# Altium PCB 板.PcbDoc (part 2 of 3)
Units mil, origin at the board's own origin, x right, y up, seen from the top; angles counter-clockwise.
Board outline 8500 x 4400 mil, 4 copper layers (Top Layer, 02gnd, 03vcc, Bottom Layer); 131 components, 485 nets, 1153 pads, 930 vias.
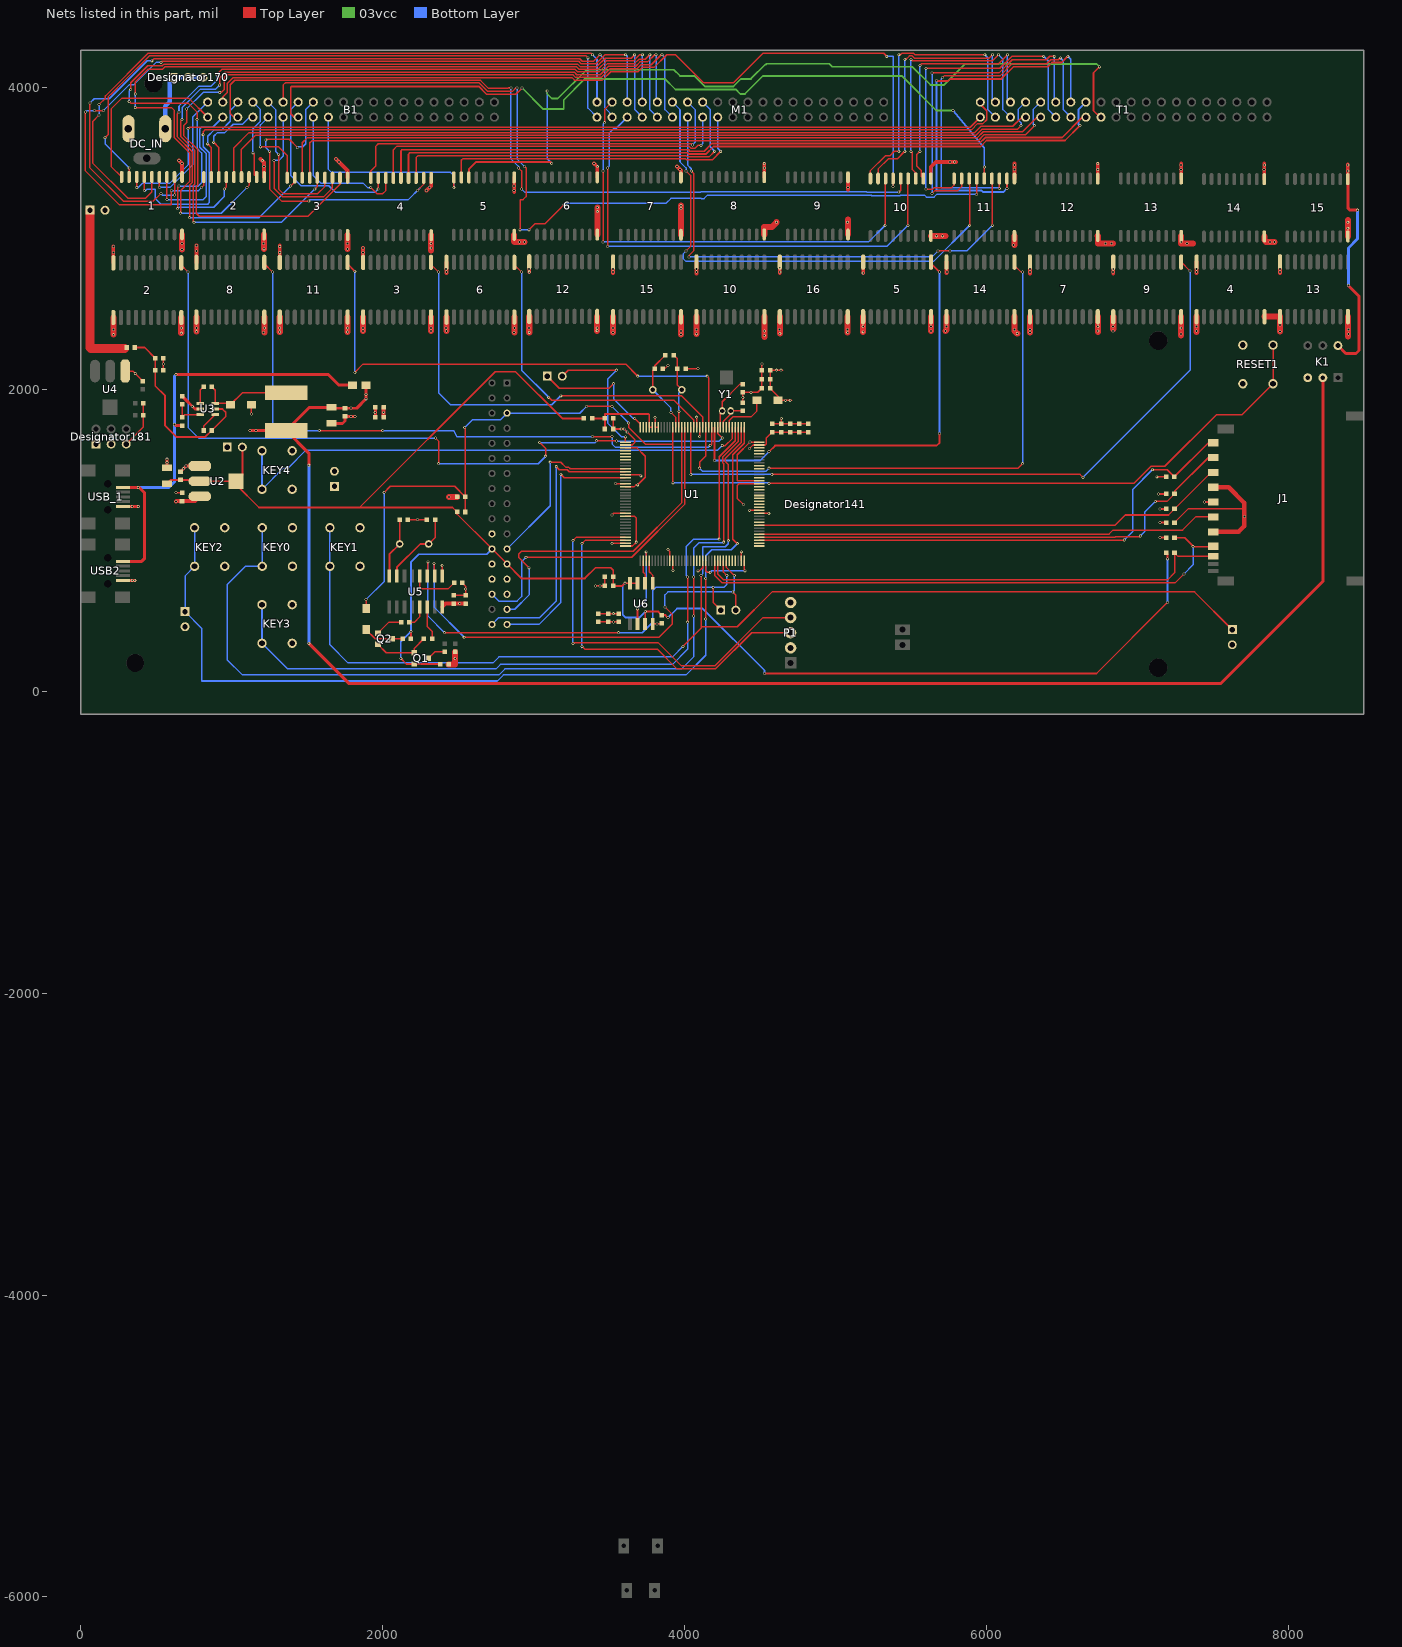
[diagram p4: the nets of this part, all layers, seen from the top]

## Via types
v1: diameter 19.68, hole 11.81, Top Layer to Bottom Layer, 922 vias
v2: diameter 118.11, hole 118.11, Top Layer to Bottom Layer, tented both sides, 4 vias
v3: diameter 50, hole 40, Top Layer to Bottom Layer, 2 vias
v4: diameter 39.37, hole 39.37, Top Layer to Bottom Layer, 2 vias

## Nets (pads, with @x,y where several pads share a name; then routed paths per layer and width w, separated by ;. In a path a pad name is that pad's centre, name@x,y a point inside that pad or via, vN(x,y) a via of type N, cw(c..) or ccw(c..) an arc to the next point about the centre after c; other vN are vias at no path point) (continued)
GND: 1.9 2.1@215,2478.9 2.9@1214,3029 2.10@665,2478.9 3.1@1869.98,2481.89 3.9@1767,3025 3.10@2319.98,2481.89 4.1@7393.56,2483.89 4.9@2321,3024 4.10@7843.56,2483.89 5.1@5183.85,2483.89 5.9@2871,3027 5.10@5633.85,2483.89 6.1@2422.41,2481.89 6.9@3422,3028 6.10@2872.41,2481.89 7.1@6288.71,2483.89 7.9@3976.3,3027 7.10@6738.71,2483.89 8.1@765.12,2481.89 8.9@4528.3,3029 8.10@1215.12,2481.89 9.1@6841.13,2483.89 9.9@5083.3,3028 9.10@7291.13,2483.89 10.1@4078.99,2483.89 10.9@5632.3,3020 10.10@4528.99,2483.89 11.1@1317.55,2481.89 11.9@6186.3,3020 11.10@1767.55,2481.89 12.1@2971,2485.9 12.9@6738.3,3019 12.10@3421,2485.9 13.1@7946.3,2484.9 13.9@7291.3,3020 13.10@8396.3,2484.9 14.1@5736.28,2483.89 14.9@7842.3,3016 14.10@6186.28,2483.89 15.1@3526.56,2483.89 15.9@8395.3,3016 15.10@3976.56,2483.89 16.1 16.10 C2.1 C3.1 C4.1 C6.1 C7.1 C8.1 C9.1 C10.1 C11.2 C12.2 C13.2 C14.2 C15.2 C16.2 C17.2 C18.2 C19.2 C20.2 C21.2 C26.1 C27.1 C29.1 C30.1 C31.1 C32.2 C37.1 C38.1 C39.1 C41.2 C42.1 C43.2 C44.1 C45.1 C47.2 C48.2 C49.2 D3.1 DC_IN.2 Designator137.1 Designator138.1 Designator139.2 Designator141.22 Designator141.26 Designator141.27 Designator141.29 Designator161.2 Designator162.2 Designator165.2 Designator166.2 Designator181.1 Designator181.3 Designator181.5 J1.3 J1.6 KEY0.1 KEY1.1 KEY2.1 KEY3.1 KEY4.1 P1.2 R7.2 R14.2 RESET1.2 U1.16 U1.30 U1.31 U1.38 U1.48 U1.51 U1.61 U1.71 U1.83 U1.94 U1.107 U1.120 U1.130 U1.143 U2.1 U3.2 U4.1 U5.1 U6.4 USB2.5 USB_1.5 | length 10532.8
  Top Layer w10: U4.1@293.97,2123.95 343.62,2123.95 C48.2@410.06,2057.5 ; Designator181.5@300,1640 414.2,1754.2 C47.2@414.2,1829.94 C49.2@414.2,1909.94 ; C30.1@547,2130 C31.1@547,2210 ; v1(630,1320) 633,1317 C26.1@670,1317 ; v1(1130,1840) D3.1@1130,1900 ; C39.1@2167,1140 C38.1@2293,1140 ; U5.1@2394.3,765.36 v1(2394.3,834.3) ; C43.2@2470.06,637.5 C32.2@2550.06,637.5 2550.06,696.94 C37.1@2527,720 ; C16.2@3428.24,461.5 C15.2@3493.24,461.5 C17.2@3563.24,461.5 ; v1(3520,1170) 3531.17,1181.17 U1.61@3608.37,1181.17 ; v1@3524.32,984.32 U1.71@3608.37,984.32 ; C10.1@3527,1810 C9.1@3527,1740 v1(3600,1740) 3670,1670 3670,1650 3653.92,1633.92 U1.38@3608.37,1633.92 ; v1(3541.98,1378.02) U1.51@3608.37,1378.02 ; U1.48@3608.37,1437.07 3702.93,1437.07 v1(3710,1430) ; U6.4@3788.36,448 3845.44,448 C41.2@3849.94,452.5 ; v1(3805.22,1815.22) U1.31@3805.22,1752.03 U1.30@3824.91,1752.03 ; C7.1@3870,2140 v1(3890,2160) ; v1(3890,940) 3903.65,926.35 U1.83@3903.65,866.21 ; C8.1@4007,2140 v1(4090,2140) ; v1(4090,800) 4100,800 4120.18,820.18 U1.94@4120.18,866.21 ; v1(4100.5,1690.5) U1.16@4100.5,1752.03 ; U1.107@4376.09,866.21 v1(4376.09,926.09) ; C3.1@4386.17,1914.13 C4.1@4386.17,1983 4485.44,1983 C13.2@4512.5,2010.06 C19.2@4512.5,2070.06 C14.2@4512.5,2130.06 v1(4512.5,2170) ; v1(4390,1240) 4350,1280 4350,1366.03 4361.98,1378.02 U1.130@4494.2,1378.02 ; v1(4430,1610) 4453.92,1633.92 U1.143@4494.2,1633.92 4533.92,1633.92 4540,1640 4540,1679 C20.2@4581,1720 C21.2@4700,1720 C18.2@4820,1720 ; U1.120@4494.2,1181.17 v1(4558.83,1181.17) ; C42.1@7247,1120 7337,1210 7710,1210
  Top Layer w20: USB2.5@279.06,737.01 v1(357.01,737.01) ; USB_1.5@279.06,1227.01 v1(380,1227.01) ; Designator162.2@570,1483.15 v1(570,1540) ; C45.1@660,1457 v1(697,1494) U2.1@788.24,1494 ; R14.2@670.06,1957.5 670.78,1957.5 755.68,1872.6 U3.2@790,1872.6 ; Designator161.2@1660,1776.85 1733.15,1776.85 1750,1793.7 C29.1@1750,1823 v1(1817,1823) ; C27.1@1951.3,1818 C2.1@1951.3,1883
  Top Layer w30: J1.6@7503.66,1058.54 7671.46,1058.54 7710,1097.08 7710,1210 7710,1250 7606.18,1353.82 J1.3@7503.66,1353.82
  Top Layer w40: v1(215,2365) 2.1@215,2478.9 ; v1(665,2375) 2.10@665,2478.9 ; v1(670,2930) 1.9@670,3030 ; v1(765.12,2385.12) 8.1@765.12,2481.89 ; v1(1214,2934) 2.9@1214,3029 ; v1@1215.12,2380 8.10@1215.12,2481.89 ; v1(1317.55,2382.45) 11.1@1317.55,2481.89 ; v1(1767,2933) 3.9@1767,3025 ; v1(1767.55,2382.45) 11.10@1767.55,2481.89 ; v1(1869.98,2390.02) 3.1@1869.98,2481.89 ; v1(2320,2390) 3.10@2319.98,2481.89 ; 2321,2924.15 4.9@2321,3024 ; v1(2422.41,2390) 6.1@2422.41,2481.89 ; C44.1@2437,180 2480,180 2479.94,180.06 R7.2@2479.94,262.5 ; v1(2440,1290) C6.1@2493,1290 ; 5.9@2871,3027 2871,2981 2872,2980 v1(2940,2980) ; v1@2872.41,2380 6.10@2872.41,2481.89 ; v1(2971,2381) 12.1@2971,2485.9 ; v1(3421,2391) 12.10@3421,2485.9 ; 6.9@3422,3028 v1(3422,3208) ; v1(3526.56,2380) 15.1@3526.56,2483.89 ; 7.9@3976.3,3027 v1(3976.3,3220) ; v1(3976.56,2366.56) 15.10@3976.56,2483.89 ; v1(4078.99,2371.01) 10.1@4078.99,2483.89 ; 8.9@4528.3,3029 4528.3,3078.3 4530,3080 4580,3080 v1(4610,3110) ; v1@4528.99,2351.01 10.10@4528.99,2483.89 ; v1(4631.42,2371.42) 16.1@4631.42,2483.89 ; v1(5081.42,2380) 16.10@5081.42,2483.89 ; 9.9@5083.3,3028 5083.3,3126.7 ; v1(5183.85,2383.85) 5.1@5183.85,2483.89 ; 10.9@5632.3,3020 5730,3020 ; v1(5633.85,2390) 5.10@5633.85,2483.89 ; v1(5730,2390) 5736.28,2396.28 14.1@5736.28,2483.89 ; 14.10@6186.28,2483.89 6186.28,2391.14 v1(6204.87,2372.55) ; v1@6186.3,2960 11.9@6186.3,3020 ; v1(6288.71,2378.71) 7.1@6288.71,2483.89 ; 12.9@6738.3,3019 6740,3017.3 6740,2970 6840,2970 ; v1@6738.71,2384.17 7.10@6738.71,2483.89 ; 6841.13,2401.13 9.1@6841.13,2483.89 ; 7291.13,2358.87 9.10@7291.13,2483.89 ; 13.9@7291.3,3020 7291.3,2970 7370,2970 ; v1@7393.56,2383.56 4.1@7393.56,2483.89 ; 14.9@7842.3,3016 7842.3,2992.3 7854.6,2980 v1(7880,2980) v1(7910,2980) ; 4.10@7843.56,2484.9 13.1@7946.3,2484.9 v1(7946.3,2386.57) ; 15.9@8395.3,3016 8395.3,3124.7 ; 8396.3,2353.7 13.10@8396.3,2484.9
  other v1: 2479.94,220 3816.9,448 3530,461.5 2550,680 340,737.01 3520,980 2230,1140 7710,1160 340,1227.01 680,1477 570,1516.57 3620,1720 3580,1740 1790,1823 1950,1850 738.28,1890 4386.17,1948.56 4440,1983 360,2107.56 547,2170 4528.99,2360 7290,2370 8400,2370 1210,2380 2870,2380 3976.56,2390 4528.99,2390 6738.71,2390 6840,2390 7393.56,2390 215,2400 4078.99,2400 4630,2400 5080,2400 6186.28,2400 6288.71,2400 8400,2400 665,2410 765.12,2410 1215.12,2410 1317.55,2410 1767.55,2410 1869.98,2410 2320,2410 2420,2410 2872.41,2410 2970,2410 3421,2410 3526.56,2410 7291.13,2410 5183.85,2420 5633.85,2420 5736.28,2420 6738.71,2420 6840,2420 7393.56,2420 7946.3,2430 2321,2940 6180,2960 670,2970 1210,2970 1767,2970 2321,2970 6790,2970 6830,2970 7330.65,2970 2906,2980 7291.3,2980 5670,3020 5710,3020 8395.3,3070.35 5080,3110 8395.3,3110 3422,3180 3976.3,3200
IOVDD: 
"IWIRE DQ": 
"JOY CLK": J1.5 U1.113 | length 3056.5
  Top Layer w10: U1.113@4494.2,1043.37 6813.37,1043.37 6840,1070 7300,1070 7386.97,1156.97 J1.5@7503.66,1156.97
"JOY DAT": J1.8 R28.1 U1.99 | length 3549.1
  Top Layer w10: U1.99@4218.61,866.21 4218.61,781.39 4260,740 7200,740 7247,787 R28.1@7247,920 7271,896 J1.8@7503.3,896
"JOY LAT": J1.7 R27.1 U1.98 | length 3740.2
  Top Layer w10: U1.98@4198.92,866.21 4198.92,771.08 4250,720 7250,720 v1(7310,780) ; R27.1@7247,1020 7314.7,1020 v1@7371.63,963.07 ; v1(7370,960) 7500.59,960 J1.7@7503.66,963.07
  Bottom Layer w10: v1(7310,780) 7370,840 v1(7370,960)
JRDO: 
JTCK: U1.109
JTDI: U1.110
JTMS: U1.105
KEY0: KEY0.2 U1.3 | length 5963.4
  Top Layer w10: v1(4060,500) v1(4060,760) ; v1(4260,990) 4260,1510 4252.13,1517.87 4252.13,1552.68 4356.4,1656.96 U1.3@4356.4,1752.03
  Bottom Layer w10: KEY0.2@1201.65,1085.9 KEY0.2@1201.65,830 1090,830 970,710 970,210 1070,110 2770,110 2810,150 3980,150 4060,230 v1(4060,500) ; v1(4060,760) 4060,950 4097.28,987.28 4257.28,987.28 v1(4260,990)
KEY1: Designator165.1 KEY1.2 U1.2 | length 8646.4
  Top Layer w10: v1(3990,300) 4110,420 4110,430 ; v1(4110,770) 4110,430 ; v1(4290,1000) 4290,1505.28 4270,1525.28 4270,1545.28 4376.09,1651.37 U1.2@4376.09,1752.03 ; Designator165.1@7630,410 7380,660 4580,660 4350,430 4110,430
  Bottom Layer w10: KEY1.2@1650,1085.9 KEY1.2@1650,830 1650,310 1770,190 2730,190 2770,230 3920,230 v1(3990,300) ; v1(4110,770) 4120,780 4120,960 4270,960 4290,980 v1(4290,1000)
KEY2: Designator166.1 KEY2.2 U1.1 | length 6217.1
  Top Layer w10: v1(4140,480) v1(4140,750) ; v1(4350,980) 4320,1010 4320,1570 4395.77,1645.77 U1.1@4395.77,1752.03
  Bottom Layer w10: KEY2.2@753.3,1085.9 KEY2.2@753.3,830 690,766.7 Designator166.1@690,530 800,420 800,70 2760,70 2800,110 4010,110 4140,240 v1(4140,480) ; v1(4140,750) 4140,900 4180,940 4310,940 v1(4350,980)
KEY3: KEY3.2 U1.4 | length 4911.3
  Top Layer w10: v1(4020,460) v1(4020,760) ; v1(4230,1010) 4230,1555.83 4336.72,1662.55 U1.4@4336.72,1752.03
  Bottom Layer w10: KEY3.2@1200,575.9 KEY3.2@1200,320 1370,150 2750,150 2780,180 3920,180 4020,280 v1(4020,460) ; v1(4020,760) 4010,770 4010,960 4060,1010 v1(4230,1010)
KEY4: KEY4.2 U1.5 | length 3587.5
  Top Layer w10: v1(4250,1630) 4270,1630 4317.03,1677.03 U1.5@4317.03,1752.03
  Bottom Layer w10: KEY4.2@1200,1595.9 KEY4.2@1200,1340 1340,1480 1371.84,1480 1491.84,1600 4220,1600 v1(4250,1630)
"LCD BL": Designator141.23 U1.46 | length 1209.8
  Top Layer w10: v1(3110,1520) 3180,1520 3212.13,1487.87 3230.91,1487.87 3242.35,1476.44 U1.46@3608.37,1476.44
  Bottom Layer w10: Designator141.23@2824.06,945.08 3110,1231.02 v1(3110,1520)
LED0: U1.135
LED1: 
LRCK: 
MCLK: 
"MP3 LEFT": 
"MP3 RIGHT": 
NetANT1_1: 
NetBAT_1: 
NetBEEP1_2: 
NetBOOT1_3: 
NetBOOT1_4: 
NetC3_2: C3.2 U1.8 Y1.2 | length 208.3
  Top Layer w10: U1.8@4257.98,1752.03 4257.98,1790.99 4306.02,1839.02 Y1.2@4306.02,1860 4385.74,1860 C3.2@4386.24,1859.5
NetC4_2: C4.2 U1.9 Y1.1 | length 357.7
  Top Layer w10: U1.9@4238.29,1752.03 4238.29,1848.3 Y1.1@4249.99,1860 4249.99,1919.99 4367.5,2037.5 C4.2@4386.24,2037.5
NetC7_2: C7.2 R2.1 U1.24 Y2.1 | length 575.7
  Top Layer w10: Y2.1@3790,2000 3790,2127.56 C7.2@3802.5,2140.06 3802.5,2159.5 R2.1@3873,2230 ; v1(3910,1850) 3943.02,1816.98 U1.24@3943.02,1752.03
  Bottom Layer w10: Y2.1@3790,2000 3910,1880 v1(3910,1850)
NetC8_2: C8.2 R2.2 U1.23 Y2.2 | length 508.6
  Top Layer w10: R2.2@3927.5,2229.94 3952.5,2204.94 3952.5,2029.63 Y2.2@3982.13,2000 ; U1.23@3962.7,1752.03 v1(3962.7,1857.3)
  Bottom Layer w10: v1(3962.7,1857.3) 3962.7,1980.58 Y2.2@3982.13,2000
NetC22_1: C22.1 U3.1 | length 119.5
  Top Layer w10: U3.1@790,1910 790,1997 C22.1@813,2020
NetC22_2: C22.2 D3.2 L1.2 U3.6 | length 626.5
  Top Layer w10: C22.2@867.5,2019.94 890,1997.44 U3.6@890,1910 980,1910 D3.2@990,1900 1070,1980 L1.2@1360,1980
NetC30_2: C30.2 C31.2 R4.1 R15.1 U3.5 | length 1235
  Top Layer w12: R4.1@357,2280 422.56,2280 C31.2@492.5,2210.06 C30.2@492.5,2130.06 492.5,2025 557.5,1960 557.5,1762.5 632.5,1687.5 824.5,1687.5 R15.1@867,1730 960,1823 960,1850 937.4,1872.6 U3.5@890,1872.6
NetC37_2: C37.2 U5.4 | length 321
  Top Layer w10: U5.4@2244.3,765.36 2244.3,695.7 2260,680 2432.44,680 C37.2@2472.5,720.06
NetC38_2: C38.2 U5.7 Y3.1 | length 512.4
  Top Layer w11.81: U5.7@2094.3,765.36 2094.3,824.3 2248,978 Y3.1@2304.3,978 2347.5,1021.2 C38.2@2347.5,1139.94
NetC39_2: C39.2 U5.8 Y3.2 | length 403
  Top Layer w11.81: U5.8@2044.3,765.36 2044.3,910.13 Y3.2@2112.17,978 2112.17,1139.74 C39.2@2112.5,1140.06
NetC46_1: 
NetC49_1: 
NetC49_2: 
NetC50_1: 
NetC50_2: 
NetC55_2: 
NetC57_1: 
NetC58_1: 
NetC66_2: 
NetC67_2: 
NetC68_2: 
NetC69_2: 
NetC70_1: 
NetC70_2: 
NetC74_2: 
NetC75_2: 
NetC76_2: 
NetC77_1: 
NetC77_2: 
NetC78_1: 
NetC78_2: 
NetC79_1: 
NetC80_1: 
NetC81_1: 
NetC82_1: 
NetC91_2: 
NetCAN1_1: 
NetCAN1_3: 
NetD1_2: D1.2 U1.6 | length 323.9
  Top Layer w10: U1.6@4297.35,1752.03 4297.35,1797.35 4320,1820 4440,1820 4480,1860 D1.2@4480,1930
NetD4_1: 1.10 2.10@1214,3409 3.10@1767,3405 4.10@2321,3404 5.10@2871,3407 6.10@3422,3408 7.10@3976.3,3407 8.10@4528.3,3409 9.10@5083.3,3408 10.10@5632.3,3400 11.10@6186.3,3400 12.10@6738.3,3399 13.10@7291.3,3400 14.10@7842.3,3396 15.10@8395.3,3396 DC_IN.1 Designator139.1 Designator170.1 Designator170.2 Designator170.3 K1.6 R4.2 | length 4833.9
  Top Layer w20: K1.6@8330,2292.6 8382.6,2240 8450,2240 8470,2260 8470,2620 v1(8400,2690) ; 15.10@8395.3,3396 8395.3,3205.3 8410.6,3190 v1(8460,3190)
  Top Layer w25: v1(650,3520) v1(670,3500) 1.10@670,3410 ; 1190,3530 1214,3506 2.10@1214,3409 ; v1(1690,3530) 1767,3453 3.10@1767,3405 ; v1(2290,3320) 2321,3351 4.10@2321,3404 ; 2871,3310 5.10@2871,3407 ; v1(3400,3500) v1(3422,3478) 6.10@3422,3408 ; v1(3950,3480) 3976.3,3453.7 7.10@3976.3,3407 ; 8.10@4528.3,3409 v1(4528.3,3498.3) ; 5083.3,3326.7 9.10@5083.3,3408 ; 10.10@5632.3,3400 5632.3,3477.7 5664.6,3510 5800,3510 ; 11.10@6186.3,3400 6186.3,3500 ; 12.10@6738.3,3399 v1(6738.3,3498.3) ; 13.10@7291.3,3400 v1@7291.3,3498.7 ; 14.10@7842.3,3396 7842.3,3500 ; 15.10@8395.3,3396 v1(8395.3,3450) v1(8395.3,3490) v1@8395.3,3494.7
  Top Layer w59.06: Designator139.1@60,3190 60,2280 66.01,2273.99 R4.2@289.99,2273.99
  Bottom Layer w20: v1(8400,2690) 8400,2940 8460,3000 v1(8460,3190)
  Bottom Layer w30: DC_IN.1@560,3730 560,3880 590,3910 590,4050 Designator170.1@610,4070 Designator170.2@710,4070 Designator170.3@810,4070
  other v1: 2870,3320 2310,3340 5083.3,3340 2870,3350 3970,3460 6186.3,3460 6738.3,3460 7290,3460 7840,3460 4528.3,3470 1214,3480 6186.3,3490 7290,3490 7842.3,3490 1710,3510 5760,3510 5790,3510 1202,3518
NetD7_2: D7.2 Q2.3 R20.2 | length 267.3
  Top Layer w10: D7.2@1890,410 1950,350 Q2.3@2061.26,350 R20.2@2132.44,350
NetDS1_1: 
NetDS2_1: 
NetEJ_2: 
NetEJ_4: 
NetF1_2: 
NetLED2: 
NetP5_5: 
NetP5_6: 
NetQ1_2: Q1.2 Q2.1 R18.2 | length 381.9
  Top Layer w10: Q2.1@1968.74,312.6 2023.94,257.4 Q1.2@2208.74,257.4 2208.74,286.3 R18.2@2272.5,350.06
NetQ1_3: Q1.3 R17.1 | length 126.6
  Top Layer w10: Q1.3@2301.26,220 2344.26,263 R17.1@2410,263
NetQ2_2: Q2.2 R19.2 | length 183.9
  Top Layer w10: Q2.2@1968.74,387.4 2041.4,460.06 R19.2@2122.5,460.06
NetQ3_2: 
NetR1_2_1: 
NetR4_1: 
NetR4_1_1: 
NetR14_1: R14.1 R16.2 U3.3 | length 212.8
  Top Layer w10: R14.1@670,1903 670,1817.56 R16.2@670.06,1817.5 687.76,1835.2 U3.3@790,1835.2
NetR15_2: R15.2 U3.4 | length 137.2
  Top Layer w10: R15.2@812.5,1730.06 812.5,1757.7 U3.4@890,1835.2
NetR18_1: R18.1 U5.14 | length 224.2
  Top Layer w10: U5.14@2294.3,560.64 2294.3,432.7 2327,400 R18.1@2327,350
NetR19_1: R19.1 U5.13 | length 147.8
  Top Layer w10: R19.1@2177,460 2210,460 2244.3,494.3 U5.13@2244.3,560.64
NetR26_1: 
NetR30_1: 
NetR31_1: 
NetR37_1: 
NetR42_1: 
NetR47_2: 
NetR55_1: 
NetR58_1: 
NetU11_11: 
"NRF CE": U1.91
"NRF CS": U1.92
"NRF IRQ": U1.93
OUTL: 
OUTR: 
"OV SCL": U1.117
"OV SDA": 
"OV VSYNC": U1.100
PA0: U1.34
PA1: U1.35
PA2: Designator182.1 U1.36 | length 852.6
  Top Layer w10: Designator182.1@3090,2090 3170,2010 3500,2010 v1(3530,2040) ; v1(3670,1810) 3706.8,1773.2 U1.36@3706.8,1752.03
  Bottom Layer w10: v1(3530,2040) 3530,1940 3660,1810 v1(3670,1810)
PA3: Designator182.2 U1.37 | length 942.5
  Top Layer w10: Designator182.2@3190,2090 3230,2130 v1(3550,2130) ; U1.37@3608.37,1653.61 v1(3608.37,1688.37)
  Bottom Layer w10: v1(3550,2130) 3490,2070 3490,1780 3581.63,1688.37 v1(3608.37,1688.37)
PA4: U1.40
PA5: U1.41
PA6: U1.42
PA7: U1.43
PA9: Designator183.1 U1.101 U5.3 | length 3074.2
  Top Layer w10: U5.3@2294.3,765.36 2300,771.06 v1(2300,860) ; v1(2410,390) v1(3562.13,390) ; v1(4190,690) 4190,590 Designator183.1@4240,540 ; U1.101@4257.98,866.21 4257.98,792.02 v1(4280,770)
  Bottom Layer w10: v1(2300,860) 2300,500 v1(2410,390) ; v1(3562.13,390) 3720,390 3790,460 3790,670 3810,690 v1(4190,690) 4260,690 4280,710 v1(4280,770)
PA10: Designator183.2 U1.102 U5.2 | length 3105.8
  Top Layer w10: v1(2340,850) 2340,769.66 U5.2@2344.3,765.36 ; v1(2540,360) 3830,360 3920,450 3920,510 v1(3870,560) ; U1.102@4277.66,866.21 4277.66,822.34 v1(4330,770) ; v1(4320,660) 4340,640 Designator183.2@4340,540
  Bottom Layer w10: v1(2340,850) 2340,560 v1(2540,360) ; v1(3870,560) 3870,640 3890,660 v1(4320,660) 4330,670 v1(4330,770)
PA11: U1.103
PA12: U1.104
PB1: Designator141.34 U1.47 | length 1852.3
  Top Layer w10: v1(3150,1490) 3170,1470 3223.51,1470 3236.76,1456.76 U1.47@3608.37,1456.76
  Bottom Layer w10: Designator141.34@2724.06,445.08 2768.98,490 3040,490 3150,600 v1(3150,1490)
PB6: U1.136
PB9: U1.140
PB10: P1.4 U1.69 | length 2678.4
  Top Layer w10: v1(3260,320) 3262.72,322.72 3827.28,322.72 3980,170 4200,170 4520,490 P1.4@4703.3,490 ; v1(3260,1000) 3283.69,1023.69 U1.69@3608.37,1023.69
  Bottom Layer w10: v1(3260,320) v1(3260,1000)
PB11: P1.3 U1.70 | length 2533.2
  Top Layer w10: v1(3320,300) 3340,280 3820,280 3950,150 3952.13,152.13 4207.4,152.13 4445.28,390 P1.3@4703.3,390 ; v1(3320,980) 3344,1004 U1.70@3608.37,1004
  Bottom Layer w10: 3320,290 v1(3320,300) v1(3320,980)
PB13: U1.74 U6.6 | length 153.1
  Top Layer w10: U1.74@3726.48,866.21 3726.48,790.11 3738.3,778.3 U6.6@3738.3,718
PB14: U1.75 U6.2 | length 562.1
  Top Layer w10: U6.2@3688.36,448 v1(3688.36,548.36) ; U1.75@3746.17,866.21 v1(3746.17,926.17)
  Bottom Layer w10: v1(3688.36,548.36) 3746.17,606.17 v1(3746.17,926.17)
PB15: U1.76 U6.5 | length 157.5
  Top Layer w10: U1.76@3765.85,866.21 3765.85,794.15 3788.3,771.7 U6.5@3788.3,718
PC10: J1.9 R22.1 U1.111 | length 3479.6
  Top Layer w10: U1.111@4494.2,1004 v1(6914,1004) ; v1(7100,1470) 7198.3,1470 R22.1@7245.3,1423 7471.39,1649.09 J1.9@7503.66,1649.09
  Bottom Layer w10: v1(6914,1004) 6970,1060 6970,1340 v1(7100,1470)
PC11: J1.1 R24.1 U1.112 | length 3313.2
  Top Layer w10: U1.112@4494.2,1023.69 6853.69,1023.69 6856.72,1026.72 7016.72,1026.72 v1(7020,1030) ; v1(7120,1260) 7197,1260 R24.1@7247,1310 7247,1327 7470,1550 J1.1@7503.3,1550
  Bottom Layer w10: v1(7020,1030) 7050,1060 7050,1190 v1(7120,1260)
PC13: U1.7
PD2: J1.2 R25.1 U1.116 | length 3153.9
  Top Layer w11.81: U1.116@4494.2,1102.43 6852.43,1102.43 6920,1170 7207,1170 R25.1@7247,1210 7489,1452 J1.2@7503.3,1452
PD6: U1.122
PD7: U1.123
PE0: U1.141
PE1: U1.142
PE6: 
PF0: 2.11@665,2841.1 U1.10 | length 5108.4
  Top Layer w10: 2.11@665,2841.1 665,2825 v1(710,2780) ; v1(2350,1680) 2370,1660 v1(2370,1510) ; v1(3040,1650) 3080,1610 v1(3080,1560) ; v1(3417.28,1662.72) 3547.28,1662.72 v1(3550,1660) ; U1.10@4218.61,1752.03 4218.61,1711.39 v1(4250,1680)
  Bottom Layer w10: v1(710,2780) 710,1750 780,1680 v1(2350,1680) ; v1(2370,1510) 2371.42,1508.58 2839.18,1508.58 2840.6,1510 3030,1510 v1(3080,1560) ; v1(3040,1650) 3410,1650 3417.28,1657.28 v1(3417.28,1662.72) ; v1(3550,1660) 4230,1660 v1(4250,1680)
PF1: 5.11@5633.85,2846.09 U1.11 | length 2982.2
  Top Layer w11.81: U1.11@4198.92,1752.03 v1(4198.92,1531.08) v1@4200,1530 ; v1(4560,1590) 4600,1630 5670,1630 5690,1650 v1(5690,1710) ; 5.11@5633.85,2846.09 5633.85,2836.15 v1(5690,2780)
  Bottom Layer w11.81: v1(4198.92,1531.08) 4501.08,1531.08 v1(4560,1590) ; v1(5690,1710) v1(5690,2780)
PF2: 8.11@1215.12,2844.09 U1.12 | length 4238.1
  Top Layer w10: 8.11@1215.12,2844.09 1215.12,2834.88 v1(1270,2780) ; v1(1580,1730) v1(2000,1730) ; v1(3390,1690) v1(3520,1690) ; v1(4170,1630) 4179.24,1639.24 U1.12@4179.24,1752.03
  Bottom Layer w10: v1(1270,2780) 1270,1750 1290,1730 1500,1730 v1(1580,1730) ; v1(2000,1730) 2470,1730 2490,1690 v1(3390,1690) ; v1(3520,1690) 3520,1640 3540,1620 4160,1620 v1(4170,1630)
PF3: 11.11@1767.55,2844.09 U1.13 | length 3481.6
  Top Layer w10: 11.11@1767.55,2844.09 1767.55,2832.45 v1(1815,2785) ; v1(1815,2115) 1870,2170 3610,2170 v1(3690,2090) ; v1(4150,2090) 4159.55,2080.45 U1.13@4159.55,1752.03
  Bottom Layer w10: v1(1815,2115) v1(1815,2785) ; v1(3690,2090) v1(4150,2090)
PF4: 14.11@6186.28,2846.09 U1.14 | length 3821.7
  Top Layer w10: v1(4100,1480) 4100,1520 4139.87,1559.87 U1.14@4139.87,1752.03 ; v1(4560,1480) 6210,1480 v1(6240,1510) ; 14.11@6186.28,2846.09 6186.28,2823.72 6230,2780 v1(6240,2780)
  Bottom Layer w10: v1(4100,1480) 4120,1460 4540,1460 v1(4560,1480) ; v1(6240,1510) v1(6240,2780)
PF5: 3.11@2319.98,2844.09 U1.15 | length 2818.8
  Top Layer w10: 3.11@2319.98,2844.09 2319.98,2830.02 v1(2370,2780) ; v1(3180,1960) 3980,1960 4120.18,1819.82 U1.15@4120.18,1752.03
  Bottom Layer w10: v1(2370,2780) 2370,1980 2450,1900 3120,1900 v1(3180,1960)
PF6: 6.11@2872.41,2844.09 U1.18 | length 2058.9
  Top Layer w10: 6.11@2872.41,2844.09 2872.41,2827.59 v1(2920,2780) ; v1(3100,1950) 3120,1930 3930,1930 4061.13,1798.87 U1.18@4061.13,1752.03
  Bottom Layer w10: v1(2920,2780) 2920,2130 v1(3100,1950)
PF7: 9.11@7291.13,2846.09 U1.19 | length 4669.1
  Top Layer w10: v1(4041.44,1438.56) U1.19@4041.44,1752.03 ; v1(4578.56,1438.56) 6621.44,1438.56 v1(6640,1420) ; 9.11@7291.13,2846.09 v1(7350,2787.23)
  Bottom Layer w10: v1(4041.44,1438.56) v1(4578.56,1438.56) v1@4580,1440 ; v1(6640,1420) 7350,2130 v1@7350,2790
PF8: U1.20
PF9: Designator141.30 U1.21 | length 2207.3
  Top Layer w10: v1(2950,890) 3650,890 4000.26,1240.26 4000.26,1750.22 U1.21@4002.07,1752.03
  Bottom Layer w10: Designator141.30@2724.06,645.08 2769.14,600 2890,600 2920,630 2920,860 v1(2950,890)
PF10: Designator141.31 U1.22 | length 2208.1
  Top Layer w10: v1(2970,820) 2900,890 2900,910 2920,930 3660,930 3982.39,1252.39 U1.22@3982.39,1752.03
  Bottom Layer w10: Designator141.31@2824.06,545.08 2875.08,545.08 2970,640 v1(2970,820)
PF11: Designator141.33 U1.49 | length 1703.7
  Top Layer w10: v1(3180,1440) 3202.61,1417.39 U1.49@3608.37,1417.39
  Bottom Layer w10: Designator141.33@2824.06,445.08 3035.08,445.08 3180,590 v1(3180,1440)
PG6: 
PG9: U1.124
PG10: U1.125
PG11: U1.126
PG13: U1.128
PG14: U1.129
PG15: U1.132
"PWM AUDIO": 
"RADIO L": 
"RADIO R": 
RESET: C6.2 D7.1 Designator141.5 R1.1 RESET1.1 U1.25 | length 8398.7
  Top Layer w10: D7.1@1890,550 v1(1890,610) ; v1(2010,1320) 2050,1360 2477.44,1360 C6.2@2547.5,1289.94 ; R1.1@2547,1190 2547.5,1190.5 C6.2@2547.5,1289.94 ; v1@2547.5,1745.86 C6.2@2547.5,1289.94 ; v1(3350,1890) v1(3520,1890) ; v1(3630,1780) 3630,1750 3740,1640 3923.33,1640 ; v1@3920,1380 v1(3923.33,1383.33) 3923.33,1640 ; U1.25@3923.33,1752.03 3923.33,1640 ; v1(4560,1380) 6977.87,1380 7090.59,1492.72 7182.72,1492.72 7525,1835 7695,1835 RESET1.1@7900,2040 RESET1.1@7900,2295.91
  Bottom Layer w10: v1(1890,610) 2010,730 v1(2010,1320) ; v1(2543.36,1750) 2593.36,1800 2779.3,1800 Designator141.5@2824.3,1845 3305,1845 v1(3350,1890) ; v1(3520,1890) v1(3630,1780) ; v1(3923.33,1383.33) 4556.67,1383.33 v1(4560,1380)
RST: 
RXD: 
SCLK: 
SDIN: 
TPAD: 
TXD: 
VBTN: C29.2 Designator161.1 F1.2 K1.2 L1.1 | length 10885.3
  Top Layer w19.68: L1.1@1360,1730 1510,1580 v1(1510,1500) ; v1(1510,320) 1777.56,52.44 7552.44,52.44 8230,730 K1.2@8230,2080 ; Designator161.1@1660,1883.15 1665.65,1877.5 C29.2@1750.06,1877.5 1817.5,1877.5 1827.5,1877.5 v1(1890,1940) v1(1890,1970) F1.2@1890,2030
  Top Layer w20: v1(1120,1730) v1(1160,1730) L1.1@1360,1730 1513.15,1883.15 Designator161.1@1660,1883.15
  Bottom Layer w19.68: v1(1510,320) v1(1510,1500)
  other v1: 1790,1880
VCC3.3: C41.1 C42.2 C44.2 C45.2 Designator137.2 Designator141.24 Designator141.25 Designator162.1 J1.4 Q1.1 R1.2 R3.2 R10.1 R11.1 R20.1 R22.2 R24.2 R25.2 R27.2 R28.2 U2.2 U2.4 U6.3 U6.7 U6.8 | length 12347.9
  Top Layer w11.81: Designator162.1@570,1376.85 595.65,1402.5 C45.2@659.94,1402.5 779.74,1402.5 U2.2@788.24,1394 U2.4@1028.24,1394 ; Designator137.2@1070,1620 1070,1435.76 U2.4@1028.24,1394 ; v1(2120,220) 2157.4,182.6 Q1.1@2208.74,182.6 C44.2@2379.97,182.6 ; R20.1@2187,350 v1(2187,397) ; R3.2@3332.5,1810.06 3189.94,1810.06 2880,2120 2746.09,2120 1846.09,1220 ; U6.7@3688.3,718 U6.8@3638.3,718 v1(3605,718) 3587,700 R11.1@3527,700 R10.1@3527,760 3527,803 3510,820 3410,820 3340,750 2919.14,750 Designator141.25@2824.06,845.08 Designator141.24@2724.06,945.08 2492.5,1176.64 R1.2@2492.5,1190.06 2462.56,1220 1846.09,1220 ; U6.3@3738.36,448 3740,449.64 v1(3740,530) 3827,530 C41.1@3850,507 3873,507 v1(3890,490) ; v1(4530,120) 6730,120 v1(7200,590) ; v1(7130,1423.06) R22.2@7190.8,1423.06 ; v1(7140.06,1310.06) R24.2@7192.5,1310.06 ; v1(7150,1120.06) C42.2@7192.5,1120.06 ; v1(7150.06,1020.06) R27.2@7192.5,1020.06 ; v1(7150.06,1210.06) R25.2@7192.5,1210.06 ; R28.2@7192.5,920.06 7200,912.56 v1(7200,880) ; v1(7445.39,1255.39) J1.4@7503.66,1255.39 ; U2.4@1028.24,1394 1028.24,1371.76 1180,1220 1846.09,1220
  Bottom Layer w11.81: v1(2120,220) 2120,330 v1(2187,397) 2187,857 2240,910 2688.98,910 Designator141.24@2724.06,945.08 ; v1(3605,718) 3590,703 3590,510 3610,490 3700,490 v1(3740,530) ; v1(3890,490) 3950,550 4120,550 4530,140 v1(4530,120) ; v1(7200,590) v1(7200,880)
VCC3.3M: C11.1 C12.1 C13.1 C14.1 C15.1 C16.1 C17.1 C18.1 C19.1 C20.1 C21.1 D1.1 R10.2 R11.2 U1.17 U1.39 U1.52 U1.62 U1.72 U1.84 U1.95 U1.108 U1.121 U1.131 U1.144 | length 2776.4
  Top Layer w10: v1(3410.06,700.06) R11.2@3472.5,700.06 R10.2@3472.5,760.06 ; C16.1@3428.3,516 C15.1@3493.3,516 C17.1@3563.3,516 ; U1.72@3608.37,964.63 3654.63,964.63 v1(3680,990) 3680,1150 3668.52,1161.48 U1.62@3608.37,1161.48 ; U1.52@3608.37,1358.33 3668.33,1358.33 3680,1370 ; U1.39@3608.37,1614.24 3685.76,1614.24 3740,1560 3740,1420 v1(3690,1370) ; v1(3923.33,803.33) U1.84@3923.33,866.21 ; U1.17@4080.81,1752.03 v1(4080.81,1818.19) ; U1.95@4139.87,866.21 4139.87,800.13 4150,790 v1(4170,790) ; 4350,1397.7 4350,1570 v1(4433.61,1653.61) U1.144@4494.2,1653.61 ; 4352.3,1397.7 U1.131@4494.2,1397.7 ; U1.108@4395.77,866.21 4395.77,804.23 v1(4400,800) ; v1(4430,1200.85) U1.121@4494.2,1200.85 ; C20.1@4581.06,1774.5 C12.1@4641.06,1774.5 ; C12.1@4641.06,1773.5 C12.1@4641.06,1774.5 ; v1(4641.06,1810) C12.1@4641.06,1774.5 ; 4650,2130 C14.1@4567,2130 C19.1@4567,2070 C13.1@4567,2010 4620,1957 D1.1@4620,1930 4710,1930 ; C18.1@4820.06,1774.5 C21.1@4700.06,1774.5 C12.1@4641.06,1774.5
  Bottom Layer w10: v1(4170,790) 4180,800 v1(4400,800)
  other v1: 3528.3,516 3440,700.06 4670,1930 4700,1930 4608.5,2130 4640,2130
VCC5: 2.20 3.20 4.20 5.20 6.20 7.20 8.20 9.20 10.20 11.20 12.20 13.20 14.20 15.20 16.20 C2.2 C26.2 C27.2 C32.1 C43.1 Designator138.2 Designator141.28 K1.3 P1.5 U2.3 U5.16 | length 1637.5
  Top Layer w25: 2.20@215,2841.1 v1(215,2910) v1(215,2950) ; v1(630,1260) 632.5,1262.5 C26.2@669.94,1262.5 756.74,1262.5 U2.3@788.24,1294 ; 8.20@765.12,2844.09 v1(765.12,2955.12) ; 11.20@1317.55,2844.09 v1@1317.55,2957.55 ; 3.20@1869.98,2844.09 v1(1869.98,2940.02) ; C27.2@2005.8,1817.94 C2.2@2005.8,1882.94 ; U5.16@2394.3,560.64 2416.66,583 C43.1@2470,583 C32.1@2550,583 ; v1@2422.41,2772.41 6.20@2422.41,2844.09 ; v1(2971,2779) 12.20@2971,2848.1 ; v1@3526.56,2773.44 15.20@3526.56,2846.09 ; v1@4078.99,2771.01 10.20@4078.99,2846.09 ; v1@4631.42,2771.42 16.20@4631.42,2846.09 ; v1(5183.85,2773.85) 5.20@5183.85,2846.09 ; v1@5736.28,2773.72 14.20@5736.28,2846.09 ; 6288.71,2768.95 7.20@6288.71,2846.09 ; v1@6841.13,2771.13 9.20@6841.13,2846.09 ; v1@7393.56,2773.56 4.20@7393.56,2846.09 ; v1@7946.3,2773.7 13.20@7946.3,2847.1
  other v1: 2510,583 2005.8,1850.44 2422.41,2780 3526.56,2780 4080,2780 4631.42,2780 5740,2780 6290,2780 6840,2780 7393.56,2780 7946.3,2780 2420,2800 2970,2800 3526.56,2800 4078.99,2800 6288.71,2800 6841.13,2800 7393.56,2800 7946.3,2800 4631.42,2808.76 1317.55,2910 1870,2910 765.12,2920 1317.55,2950
VDDA: C9.2 C10.2 R3.1 U1.32 U1.33 | length 582.9
  Top Layer w11.81: R3.1@3387.06,1810.06 C10.2@3472.5,1810.06 ; C9.2@3472.5,1740.06 C10.2@3472.5,1810.06 ; U1.32@3785.54,1752.03 U1.33@3765.85,1752.03 3765.85,1834.15 3760,1840 3472.5,1840 C10.2@3472.5,1810.06
VDDAMP: 
VUSB: F1.1 R16.1 USB2.1 USB_1.1 | length 2949.8
  Top Layer w19.68: USB2.1@279.06,862.99 402.99,862.99 420,880 420,1320 387.01,1352.99 v1(380,1352.99) USB_1.1@279.06,1352.99 ; v1(620,1770) 627,1763 R16.1@670,1763 ; v1(630,2100) 1640,2100 1710,2030 F1.1@1800,2030
  Bottom Layer w19.68: v1(380,1352.99) 582.99,1352.99 620,1390 v1(620,1770) 620,2090
W1: 1.18 B1.1 | length 1201.4
  Top Layer w10: 1.18@270,3410 200,3480 200,3860 272.72,3932.72 713.7,3932.72 B1.1@840,3806.42
W2: 1.17 M1.1 | length 4320.9
  Top Layer w10: v1(160,3670) 180,3690 180,3940 207.5,3967.5 207.79,3967.5 275.8,4035.51 275.8,4035.8 452.13,4212.13 3347.87,4212.13 v1(3360,4200) ; 1.17@320,3410 v1(320,3470)
  Bottom Layer w10: v1(160,3670) 160,3630 v1(320,3470) ; v1(3360,4200) 3360,3866.42 M1.1@3420,3806.42
W3: 1.16 T1.1 | length 5983.8
  Top Layer w10: v1(370,3340) 1.16@370,3410 ; v1(710,3730) 720,3740 5893.58,3740 T1.1@5960,3806.42
  Bottom Layer w10: 380,3340 410,3370 590,3370 710,3490 v1(710,3730)
W4: 1.15 T1.21 | length 6453.2
  Top Layer w10: v1(420,3320) 1.15@420,3410 ; v1(810,3690) 810,3710 822.13,3722.13 5900.98,3722.13 5942.4,3763.55 5977.76,3763.55 6002.87,3788.66 6002.87,3849.29 5960,3892.17 T1.21@5960,3906.42
  Bottom Layer w10: v1(420,3320) 430,3320 439.41,3329.41 492.72,3329.41 492.72,3267.28 530,3230 840,3230 850,3240 850,3570 810,3610 v1(810,3690)
W5: 1.14 M1.21 | length 4758.3
  Top Layer w10: v1(120,3820) 80,3780 80,3500 310,3270 430,3270 470,3310 1.14@470,3410 ; v1(120,3890) 162.13,3932.13 162.13,3947.4 444.72,4230 3380,4230 v1(3390,4220)
  Bottom Layer w10: v1(120,3820) v1(120,3890) ; v1(3390,4220) 3420,4190 M1.21@3420,3906.42
W6: 1.13 B1.21 | length 810
  Top Layer w10: v1(520,3340) 1.13@520,3410
  Bottom Layer w10: v1(520,3340) 522.72,3342.72 592.72,3342.72 740,3490 740,3806.42 B1.21@840,3906.42
W7: 1.12 B1.2 | length 1068.8
  Top Layer w10: v1(570,3260) 1.12@570,3410
  Bottom Layer w10: v1(570,3260) 810,3260 830,3280 830,3564.72 787.28,3607.44 787.28,3727.28 800,3740 873.58,3740 B1.2@940,3806.42
W8: 1.11 M1.2 | length 5196.8
  Top Layer w10: v1(60,3900) 60,3470 280,3250 480,3250 v1(530,3300) ; v1(470,4180) 484.25,4194.25 3305.75,4194.25 3322.72,4177.28 3397.28,4177.28 v1(3440,4220) ; v1(620,3290) 622.72,3292.72 622.72,3407.28 1.11@620,3410
  Bottom Layer w10: v1(60,3900) 87.82,3927.82 187.82,3927.82 440,4180 v1@465.28,4180 ; v1(530,3300) 540,3290 v1(620,3290) ; v1(3440,4220) 3470,4190 3470,3870.67 3520,3820.67 M1.2@3520,3806.42
W9: 10.18@5232.3,3400 T1.2 | length 1954.2
  Top Layer w10: 10.18@5232.3,3400 5232.3,3452.3 5330,3550 5360,3550 5390,3580 v1(5420,3580) ; v1(5420,4220) 5430,4220 5440.59,4230.59 5516.81,4230.59 5527.4,4220 v1(5990,4220)
  Bottom Layer w10: v1(5420,3580) v1(5420,4220) ; v1(5990,4220) 6010,4200 6010,3856.42 T1.2@6060,3806.42
W10: 10.17@5282.3,3400 T1.22 | length 1825.8
  Top Layer w10: 10.17@5282.3,3400 5282.3,3462.3 5350,3530 5410,3530 v1(5460,3580) ; v1(5460,4190) 5467.87,4190 5490.59,4212.72 5509.41,4212.72 5524.84,4197.28 6017.28,4197.28 v1(6040,4220)
  Bottom Layer w10: v1(5460,3580) v1(5460,4190) ; v1(6040,4220) 6040,3926.42 T1.22@6060,3906.42
W11: 10.16@5332.3,3400 M1.22 | length 3177.8
  Top Layer w10: v1(3460,2980) v1(3460,3450) ; v1(3470,3770) 3470,3856.42 M1.22@3520,3906.42 ; v1(5330,3090) 5330,3397.7 10.16@5332.3,3400
  Bottom Layer w10: v1(3460,2980) 5220,2980 v1(5330,3090) ; v1(3460,3450) 3460,3760 v1(3470,3770)
W12: 10.15@5382.3,3400 B1.22 | length 5720.7
  Top Layer w10: B1.22@940,3906.42 940,3940 970,3970 970,4030 1009.13,4069.13 3253.92,4069.13 3270.89,4052.17 3455.96,4052.17 3511.7,4107.91 3691.15,4107.91 3719.61,4136.38 3798.5,4136.38 3882.13,4220 3940,4220 4125.39,4034.61 4324.61,4034.61 4520,4230 5320,4230 v1(5340,4210) ; v1(5382.3,3347.7) 10.15@5382.3,3400
  Bottom Layer w10: v1(5340,4210) 5380,4210 5382.72,4207.28 5382.72,3348.12 v1(5382.3,3347.7)
W13: 10.14@5432.3,3400 B1.3 | length 5455.1
  Top Layer w10: B1.3@1040,3806.42 1013.58,3806.42 990,3830 990,4021.26 1020,4051.26 2648.74,4051.26 2648.74,4049.13 2700.59,3997.28 2829.41,3997.28 2832.13,4000 v1(2850,4000) ; v1(2900,3470) 2920,3450 v1(2920,3330) ; v1(5420,3310) 5432.3,3322.3 10.14@5432.3,3400
  Bottom Layer w10: v1(2850,4000) 2850,3530 2900,3480 v1(2900,3470) ; v1(2920,3330) 2940,3310 4107.87,3310 4110.59,3312.72 5205.16,3312.72 5210.59,3307.28 5229.41,3307.28 5232.13,3310 v1(5420,3310)
W14: 10.13@5482.3,3400 M1.3 | length 3277.2
  Top Layer w10: v1(3490,2950) v1(3490,3470) ; v1(5480,3090) 5480,3397.7 10.13@5482.3,3400
  Bottom Layer w10: v1(3490,2950) 5340,2950 v1(5480,3090) ; v1(3490,3470) 3500,3480 3500,3700 3530,3730 3543.58,3730 M1.3@3620,3806.42
W15: 10.12@5532.3,3400 T1.3 | length 1851.3
  Top Layer w10: v1(5500,3580) 5510,3570 5510,3459.22 5532.3,3436.93 10.12@5532.3,3400 ; v1(5500,4190) 5510.59,4179.41 6039.41,4179.41 v1(6080,4220)
  Bottom Layer w10: v1(5500,3580) v1(5500,4190) ; v1(6080,4220) 6110,4190 6110,3856.42 T1.3@6160,3806.42
W16: 10.11@5582.3,3400 T1.23 | length 1706.7
  Top Layer w10: v1(5560,3580) 5540,3560 5540,3481.72 5570,3451.72 5570,3412.3 10.11@5582.3,3400 ; v1(5560,4150) 5570,4160 6080,4160 v1(6140,4220)
  Bottom Layer w10: v1(5560,3580) v1(5560,4150) ; v1(6140,4220) 6140,3926.42 T1.23@6160,3906.42
W17: 2.18@814,3409 M1.23 | length 5497.1
  Top Layer w10: v1(30,3840) 30,3450 252.72,3227.28 597.28,3227.28 597.28,3317.28 v1(600,3320) ; v1(90,3850) v1(150,3850) ; v1(530,4170) 536.38,4176.38 3298.34,4176.38 3315.31,4159.41 3411.54,4159.41 3472.13,4220 v1(3610,4220) ; v1(800,3340) 814,3354 2.18@814,3409
  Bottom Layer w10: v1(30,3840) 40,3850 v1(90,3850) ; v1(150,3850) 322.13,4022.13 352.13,4022.13 501.06,4171.06 v1@531.06,4171.06 ; v1(600,3320) 780,3320 v1(800,3340) ; v1(3610,4220) 3620,4210 M1.23@3620,3906.42
W18: 2.17@864,3409 B1.23 | length 619.5
  Top Layer w10: v1(840,3630) 864,3606 2.17@864,3409
  Bottom Layer w10: v1(840,3630) 840,3680 882.13,3722.13 932.13,3722.13 990,3780 990,3850 1040,3900 B1.23@1040,3906.42
W19: 2.16@914,3409 B1.4 | length 597.4
  Top Layer w10: v1(880,3640) 914,3606 2.16@914,3409
  Bottom Layer w10: v1(880,3640) 880,3680 904.25,3704.25 954.25,3704.25 1010,3760 1070,3760 1116.42,3806.42 B1.4@1140,3806.42
W20: 2.15@964,3409 M1.4 | length 5745
  Top Layer w10: v1(320,3910) 330,3900 710,3900 766.06,3843.94 770,3840 v1(770,3790) ; v1(330,3990) 330,4034.72 442.56,4147.28 539.41,4147.28 550.63,4158.5 3290.94,4158.5 3307.91,4141.54 3418.94,4141.54 3474.69,4197.28 3647.28,4197.28 v1(3670,4220) ; v1(640,3200) 642.72,3202.72 642.72,3342.72 v1(650,3350) ; v1(950,3330) 964,3344 2.15@964,3409
  Bottom Layer w10: v1(320,3910) 320,3980 v1(330,3990) ; v1(640,3200) 650,3210 880,3210 950,3280 v1(950,3330) ; v1(650,3350) 777.87,3350 800,3372.13 800,3569.44 769.41,3600.04 769.41,3789.41 v1(770,3790) ; v1(3670,4220) 3670,3856.42 M1.4@3720,3806.42
W21: 2.14@1014,3409 T1.4 | length 5524.8
  Top Layer w10: 2.14@1014,3409 1014,3604 1114.25,3704.25 5923.7,3704.25 5965.12,3745.67 5985.16,3745.67 5985.24,3745.75 6175.75,3745.75 6236.42,3806.42 T1.4@6260,3806.42
W22: 2.13@1064,3409 T1.24 | length 5601
  Top Layer w10: 2.13@1064,3409 1064,3594 1156.38,3686.38 5931.1,3686.38 5972.52,3727.8 5992.57,3727.8 5992.64,3727.87 6207.87,3727.87 v1(6230,3750)
  Bottom Layer w10: v1(6230,3750) 6230,3770 6210,3790 6210,3856.42 T1.24@6260,3906.42
W23: 2.12@1114,3409 M1.24 | length 5531.6
  Top Layer w10: v1(360,3870) 600,3870 620,3850 620,3670 720,3570 720,3380 662.72,3322.72 662.72,3172.72 v1(660,3170) ; v1(360,3960) 360,4039.44 444.18,4123.62 541.03,4123.62 558.03,4140.63 3283.54,4140.63 3300.51,4123.66 3426.34,4123.66 3482.09,4179.41 3661.54,4179.41 3702.13,4220 v1(3720,4220) ; v1(1100,3340) 1114,3354 2.12@1114,3409
  Bottom Layer w10: v1(360,3870) v1(360,3960) ; v1(660,3170) 930,3170 v1(1100,3340) ; M1.24@3720,3906.42 v1(3720,4220)
W24: 2.11@1164,3409 B1.24 | length 548.8
  Top Layer w10: v1(1140,3570) 1150,3560 1150,3423 2.11@1164,3409
  Bottom Layer w10: v1(1140,3570) 1140,3730 1190,3780 1190,3856.42 B1.24@1140,3906.42
W25: 3.18@1367,3405 B1.5 | length 565.7
  Top Layer w10: v1(1190,3610) 1310,3610 1367,3553 3.18@1367,3405
  Bottom Layer w10: v1(1190,3610) 1190,3754.72 1240,3804.72 B1.5@1240,3806.42
W26: 3.17@1417,3405 M1.5 | length 5347.9
  Top Layer w10: v1(650,3840) 640,3830 640,3675.28 737.87,3577.4 737.87,3372.6 720,3354.72 v1(720,3140) ; v1(900,4090) 932.76,4122.76 3276.13,4122.76 3293.1,4105.79 3433.75,4105.79 3489.49,4161.54 3668.94,4161.54 3697.4,4190 3740,4190 v1(3770,4220) ; v1(1390,3350) 1417,3377 3.17@1417,3405
  Bottom Layer w10: v1(650,3840) 650,3880 780,4010 860,4010 900,4050 v1(900,4090) ; v1(720,3140) 1180,3140 v1(1390,3350) ; v1(3770,4220) 3770,3856.42 M1.5@3820,3806.42
W27: 3.16@1467,3405 T1.5 | length 5195.2
  Top Layer w10: 3.16@1467,3405 1467,3637 1498.5,3668.5 5938.5,3668.5 5979.92,3709.92 5999.97,3709.92 6000.05,3710 6240,3710 6336.42,3806.42 T1.5@6360,3806.42
W28: 3.15@1517,3405 T1.25 | length 5263.1
  Top Layer w10: 3.15@1517,3405 1517,3637 1530.63,3650.63 5945.91,3650.63 5985.28,3690 6260,3690 v1(6320,3750)
  Bottom Layer w10: v1(6320,3750) 6310,3760 6310,3856.42 T1.25@6360,3906.42
W29: 3.14@1567,3405 M1.25 | length 5420.6
  Top Layer w10: v1(670,3790) 660,3780 660,3680.56 755.75,3584.81 755.75,3365.19 745.75,3355.19 745.75,3114.25 v1(750,3110) ; v1(920,4020) 920,4070 954.88,4104.88 3268.73,4104.88 3285.7,4087.91 3441.15,4087.91 3496.9,4143.66 3676.34,4143.66 3704.81,4172.13 3754.25,4172.13 v1@3802.13,4220 ; v1(1550,3330) 1567,3347 3.14@1567,3405
  Bottom Layer w10: v1(670,3790) 672.72,3792.72 672.72,3872.72 790,3990 890,3990 v1(920,4020) ; v1(750,3110) 1330,3110 v1(1550,3330) ; v1(3811.06,4220) 3811.06,3915.36 M1.25@3820,3906.42
W30: 3.13@1617,3405 B1.25 | length 1002.3
  Top Layer w10: v1(1310,3560) 1310,3330 1340,3300 1570,3300 1617,3347 3.13@1617,3405
  Bottom Layer w10: B1.25@1240,3906.42 1290,3856.42 1290,3580 v1(1310,3560)
W31: 3.12@1667,3405 B1.6 | length 1016.6
  Top Layer w10: v1(1280,3520) 1280,3334.72 1334.72,3280 1610,3280 1667,3337 3.12@1667,3405
  Bottom Layer w10: v1(1280,3520) 1312.13,3520 1340,3547.87 B1.6@1340,3806.42
W32: 3.11@1717,3405 M1.6 | length 5636.5
  Top Layer w10: v1(700,3860) 700,3770 680,3750 680,3685.83 773.62,3592.21 773.62,3357.79 763.62,3347.79 763.62,3170 783.62,3150 1505.28,3150 1717,3361.72 3.11@1717,3405 ; v1(920,3970) 930,3970 950,3990 950,4070.02 966.99,4087.01 3261.33,4087.01 3278.29,4070.04 3448.55,4070.04 3504.3,4125.79 3683.75,4125.79 3712.21,4154.25 3779.53,4154.25 3845.28,4220 v1(3850,4220)
  Bottom Layer w10: v1(700,3860) 810,3970 v1(920,3970) ; v1(3850,4220) 3870,4200 3870,3856.42 M1.6@3920,3806.42
W33: 11.18@5786.3,3400 T1.6 | length 2290.7
  Top Layer w10: v1(5600,3330) 5644.72,3330 5652.6,3337.87 5767.87,3337.87 5786.3,3356.3 11.18@5786.3,3400 ; v1(5600,4130) 6089.44,4130 6169.44,4210 v1(6380,4210)
  Bottom Layer w10: v1(5600,3330) v1(5600,4130) ; v1(6380,4210) 6410,4180 6410,3856.42 T1.6@6460,3806.42
W34: 11.17@5836.3,3400 T1.26 | length 2232.5
  Top Layer w10: v1(5640,3300) 5660,3320 5810,3320 5836.3,3346.3 11.17@5836.3,3400 ; v1(5640,4100) 6084.72,4100 6172.01,4187.28 6397.28,4187.28 6420,4210 v1(6450,4210)
  Bottom Layer w10: v1(5640,3300) v1(5640,4100) ; v1(6450,4210) 6450,3916.42 T1.26@6460,3906.42
W35: 11.16@5886.3,3400 M1.26 | length 3426.1
  Top Layer w10: v1(4010,2920) 4040,2950 4040,3420 v1(4010,3450) ; 11.16@5886.3,3400 5890,3396.3 v1(5890,3090)
  Bottom Layer w10: M1.26@3920,3906.42 3970,3856.42 3970,3510 4010,3470 v1(4010,3450) ; v1(4010,2920) 3990,2900 3990,2870 4010,2850 5650,2850 v1(5890,3090)
W36: 11.15@5936.3,3400 B1.26 | length 5936.1
  Top Layer w10: B1.26@1340,3906.42 1340,4020 1353.39,4033.39 2639.21,4033.39 2695.31,3977.28 2859.41,3977.28 2882.13,4000 v1(2890,4000) ; v1(2910,3060) 2910,3260 2930,3260 2950,3280 2950,3470 v1(2940,3480) ; v1(2970,3060) 3010,3100 3075.28,3100 v1(3202.64,3227.36) ; v1(5933.99,3293.99) 5936.3,3296.3 11.15@5936.3,3400
  Bottom Layer w10: v1(2890,4000) 2890,3530 v1(2940,3480) ; v1(2910,3060) v1(2970,3060) ; v1(3202.64,3227.36) 3212.56,3237.28 3879.41,3237.28 3910,3267.87 4110,3267.87 4110.59,3267.28 4129.41,3267.28 4152.13,3290 5202.6,3290 5203.19,3289.41 5236.81,3289.41 5238.94,3287.28 5429.41,3287.28 5432.13,3290 5590,3290 5602.72,3277.28 5653.28,3277.28 5669.99,3293.99 v1(5933.99,3293.99)
W37: 11.14@5986.3,3400 B1.7 | length 5552.7
  Top Layer w11.81: B1.7@1440,3806.42 1413.58,3806.42 1390,3830 1390,4004.61 1395.39,4010 2636.04,4010 2687.53,3958.5 2881.91,3958.5 v1(2923.41,4000) ; 11.14@5986.3,3400 v1(5986.3,3476.3)
  03vcc w11.81: v1(2923.41,4000) 3063.41,3860 3200,3860 3200,3920 3340,4060 3870,4060 3940,3990 4301.37,3990 4301.61,3990.25 4339.75,3990.25 4370,3960 4400,3960 4520,4080 5440,4080 5670,3850 v1(5780,3850)
  Bottom Layer w11.81: v1(5780,3850) 5986.3,3603.7 v1(5986.3,3476.3)
W38: 11.13@6036.3,3400 M1.7 | length 3363.9
  Top Layer w10: v1(4030,2880) 4030,2890 4060,2920 4060,3435 v1(4045,3450) ; v1(5680,2920) v1(5760,2920) ; 11.13@6036.3,3400 6040,3396.3 v1(6040,3090)
  Bottom Layer w10: M1.7@4020,3806.42 4020,3490 4045,3465 v1(4045,3450) ; v1(4030,2880) 5640,2880 v1(5680,2920) ; v1(5760,2920) 5870,2920 v1(6040,3090)
W39: 11.12@6086.3,3400 T1.7 | length 2446.5
  Top Layer w10: v1(5710,4070) 5720,4080 6090,4080 6170,4160 6400,4160 6427.28,4187.28 6477.28,4187.28 v1(6490,4200) ; v1(6086.3,3333.7) 11.12@6086.3,3400
  Bottom Layer w10: v1(5710,4070) 5700,4060 5700,3338.78 6081.22,3338.78 v1(6086.3,3333.7) ; v1(6490,4200) 6510,4180 6510,3856.42 T1.7@6560,3806.42
W40: 11.11@6136.3,3400 T1.27 | length 2531.6
  Top Layer w11.81: v1(5670,4050) 5673.62,4046.38 5746.38,4046.38 5760,4060 6100,4060 6180,4140 6406.56,4140 6435.06,4168.5 6498.5,4168.5 v1(6540,4210) ; v1(6136.3,3333.7) 11.11@6136.3,3400
  Bottom Layer w11.81: v1(5670,4050) 5670,3320 5970,3320 5980,3310 6100,3310 ; 6096.08,3310.08 6112.68,3310.08 v1(6136.3,3333.7) ; v1(6540,4210) 6560,4190 T1.27@6560,3906.42
W41: 4.18@1921,3404 M1.27 | length 2643.6
  Top Layer w10: 4.18@1921,3404 1921,3448.87 1952.72,3480.59 1952.72,3612.72 1970,3630 4045.43,3630 v1(4052.72,3622.72)
  Bottom Layer w10: M1.27@4020,3906.42 4070,3856.42 4070,3640 v1(4052.72,3622.72)
W42: 4.17@1971,3404 B1.27 | length 1215.4
  Top Layer w10: v1(1970,3330) 1971,3331 4.17@1971,3404
  Bottom Layer w10: B1.27@1440,3906.42 1390,3856.42 1390,3420 1457.28,3352.72 1582.01,3352.72 1582.6,3352.13 1642.85,3352.13 1684.98,3310 1950,3310 v1(1970,3330)
W43: 4.16@2021,3404 B1.8 | length 1008.8
  Top Layer w10: v1(1920,3340) 1960,3300 2000,3300 2021,3321 4.16@2021,3404
  Bottom Layer w10: B1.8@1540,3806.42 1540,3420 1590,3370 1870,3370 1900,3340 v1(1920,3340)
W44: 4.15@2071,3404 M1.8 | length 2438.6
  Top Layer w10: 4.15@2071,3404 2071,3591 2092.13,3612.13 4031.18,3612.13 4043.31,3600 4070,3600 4090,3620 v1(4110,3620)
  Bottom Layer w10: v1(4110,3620) 4120,3630 M1.8@4120,3806.42
W45: 4.14@2121,3404 T1.8 | length 4818.6
  Top Layer w11.81: 4.14@2121,3404 2121,3584.35 2126.65,3590 4026.75,3590 4035.53,3581.22 4129.37,3581.22 4180,3631.85 5953.69,3631.85 5993.06,3671.22 6501.22,3671.22 6636.42,3806.42 T1.8@6660,3806.42
W46: 4.13@2171,3404 T1.28 | length 4872.8
  Top Layer w11.81: 4.13@2171,3404 2171,3561 2180.32,3570.32 4018.6,3570.32 4027.37,3561.54 4141.54,3561.54 4192.17,3612.17 5961.84,3612.17 6001.21,3651.54 6521.54,3651.54 v1(6620,3750)
  Bottom Layer w11.81: v1(6620,3750) 6610,3760 6610,3856.42 T1.28@6660,3906.42
W47: 4.12@2221,3404 M1.28 | length 2496.5
  Top Layer w10: 4.12@2221,3404 2221,3539 2232,3550 4012.35,3550 4019.6,3542.76 4162.76,3542.76 v1(4200,3580)
  Bottom Layer w10: M1.28@4120,3906.42 4170,3856.42 4170,3610 v1(4200,3580)
W48: 4.11@2271,3404 B1.28 | length 2105.5
  Top Layer w10: v1(1225,3655) 1230,3660 1380,3660 v1(1435,3605) ; v1(1250,3580) 1250,3330 1330,3250 v1(1510,3250) ; v1(2230,3320) 2271,3361 4.11@2271,3404
  Bottom Layer w10: v1(1225,3655) 1225,3605 v1(1250,3580) ; v1@1430,3600 v1(1435,3605) 1440,3610 1470,3610 1490,3630 1490,3856.42 B1.28@1540,3906.42 ; v1(1510,3250) 1520,3260 2170,3260 2246,3336
W49: 5.18@2471,3407 B1.9 | length 1342.4
  Top Layer w10: v1(2471,3339) 5.18@2471,3407
  Bottom Layer w10: B1.9@1640,3806.42 1640,3460 1660,3440 2450,3440 2471,3419 v1(2471,3339)
W50: 5.17@2521,3407 M1.9 | length 2098.1
  Top Layer w10: 5.17@2521,3407 2521,3521 2532.13,3532.13 4004.95,3532.13 4012.19,3524.88 4184.88,3524.88 v1(4240,3580)
  Bottom Layer w10: M1.9@4220,3806.42 4220,3600 v1(4240,3580)
W51: 5.16@2571,3407 T1.9 | length 5498.6
  Top Layer w11.81: 5.16@2571,3407 2571,3461 2620,3510 3110,3510 v1(3120,3500) ; v1(6750,4140) 6710,4100 6710,3850 6753.58,3806.42 T1.9@6760,3806.42
  03vcc w11.81: v1(3090,3980) 3090,3960 3120,3930 3160,3930 3351.22,4121.22 3928.78,4121.22 3970,4080 4063.44,4080 4133.44,4010 4324.31,4010 4374.31,4060 4440,4060 4536.38,4156.38 4539.78,4156.38 4543.41,4160 4960,4160 4980,4140 5510,4140 5630,4020 5720,4020 5860,4160 6371.32,4160 6372.81,4158.5 6731.5,4158.5 v1(6750,4140)
  Bottom Layer w11.81: v1(3090,3980) 3090,3530 v1(3120,3500)